# Altium PCB stm32dev.PcbDoc
Units mm, origin at the board's own origin, x right, y up, seen from the top; angles counter-clockwise.
Board outline 32 x 46 mm, 4 copper layers (Top Layer, Mid Layer 1, Mid Layer 2, Bottom Layer), stack 1.57 mm thick; 36 components, 31 nets, 146 pads, 24 vias.
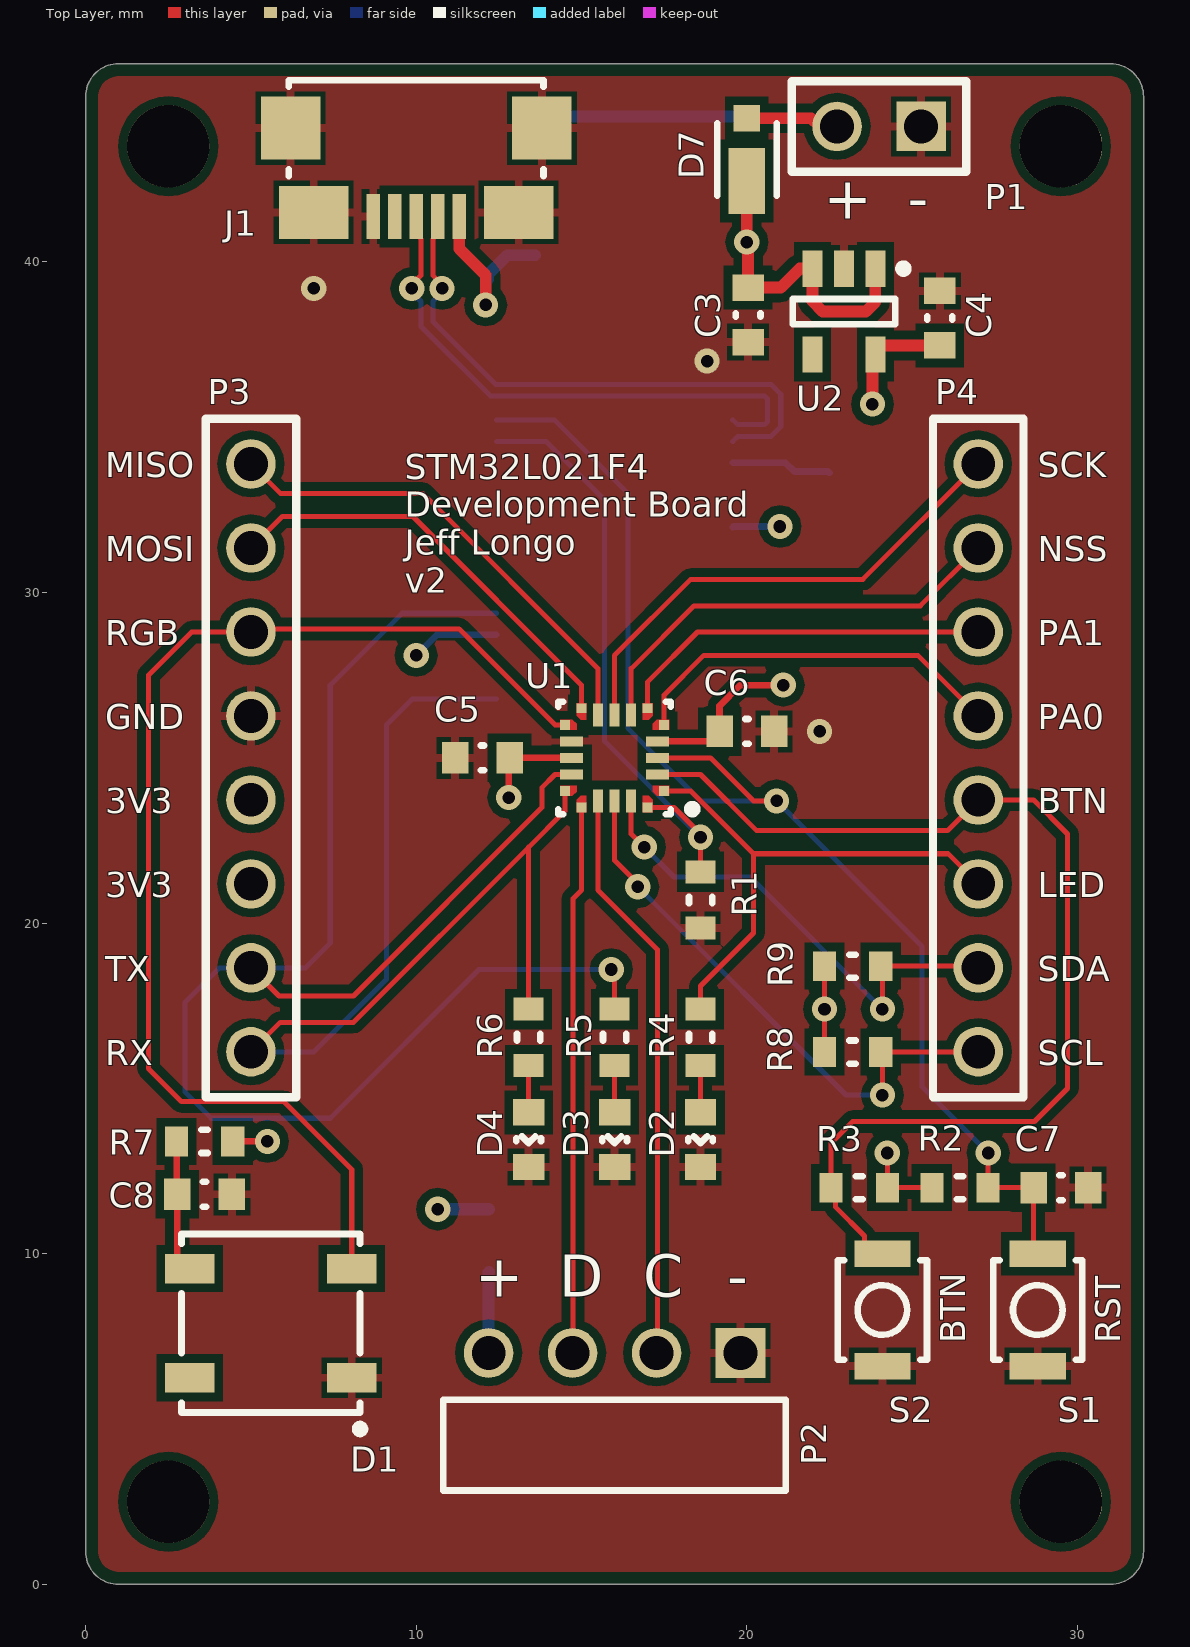
[diagram p0: Top Layer view]
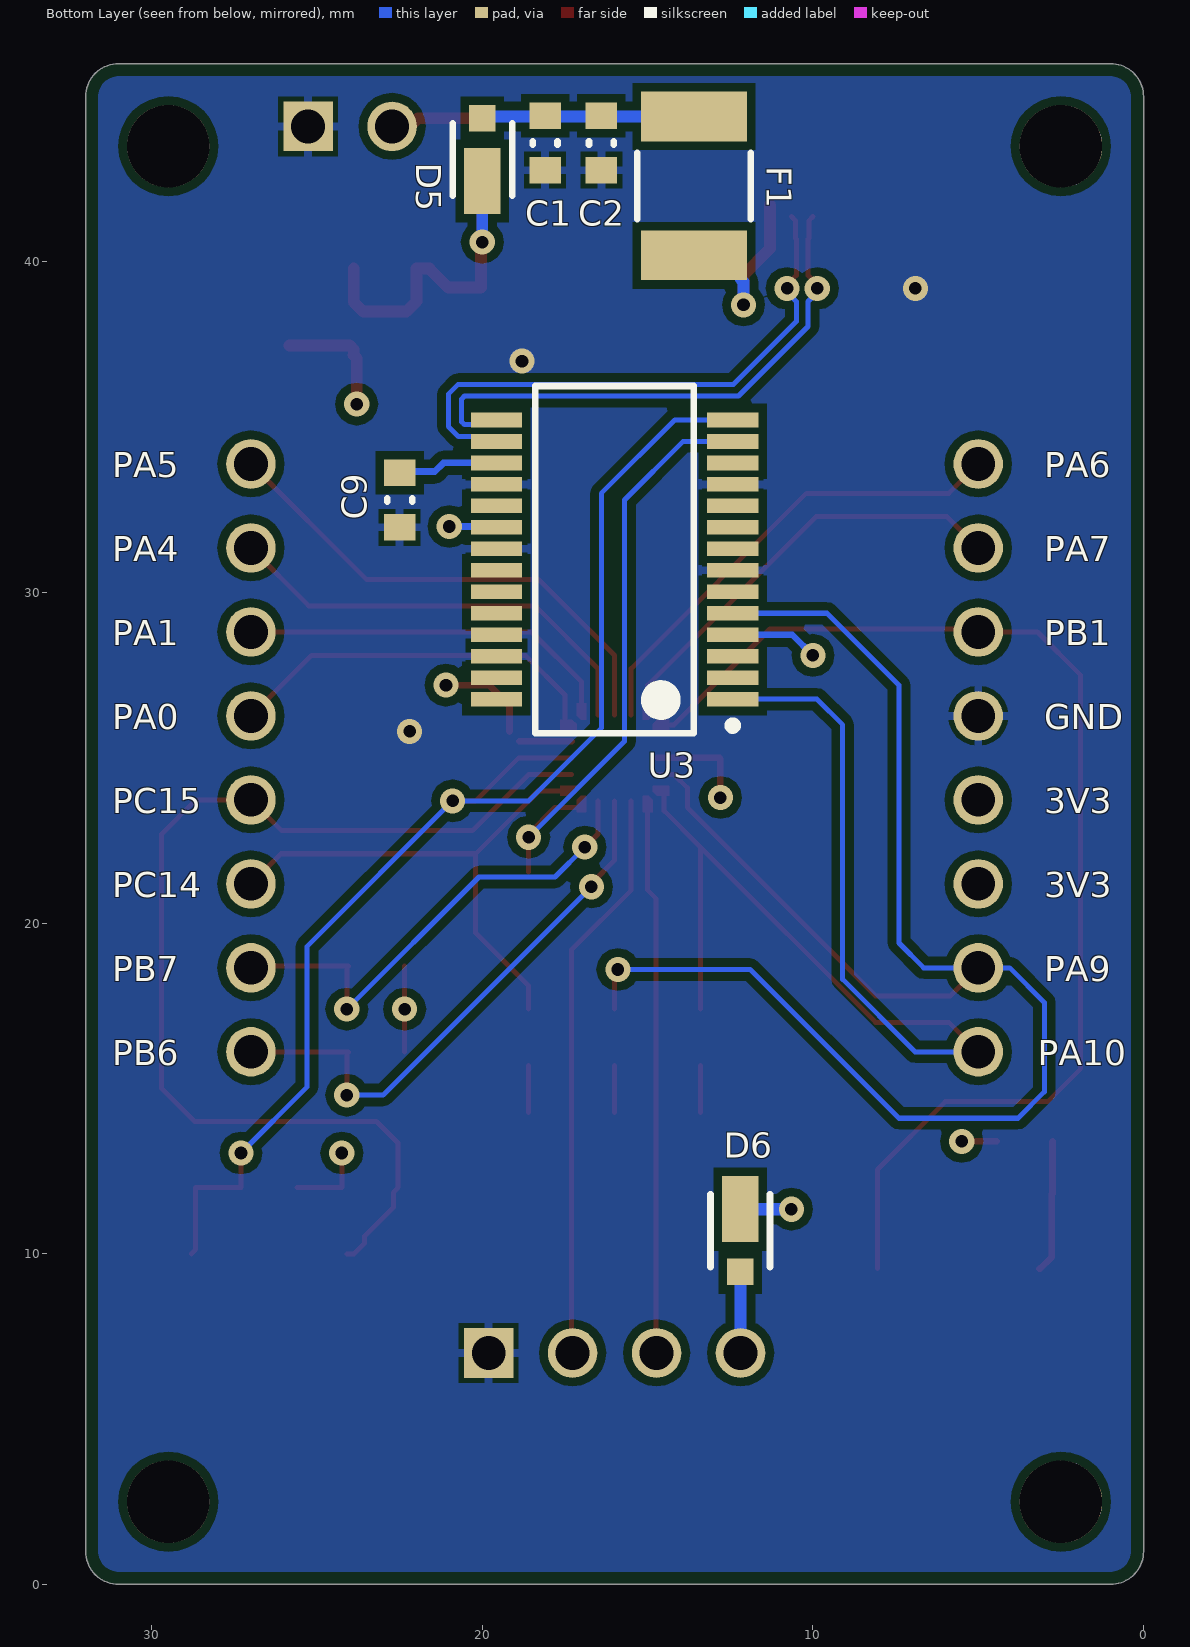
[diagram p1: Bottom Layer view, seen from below]
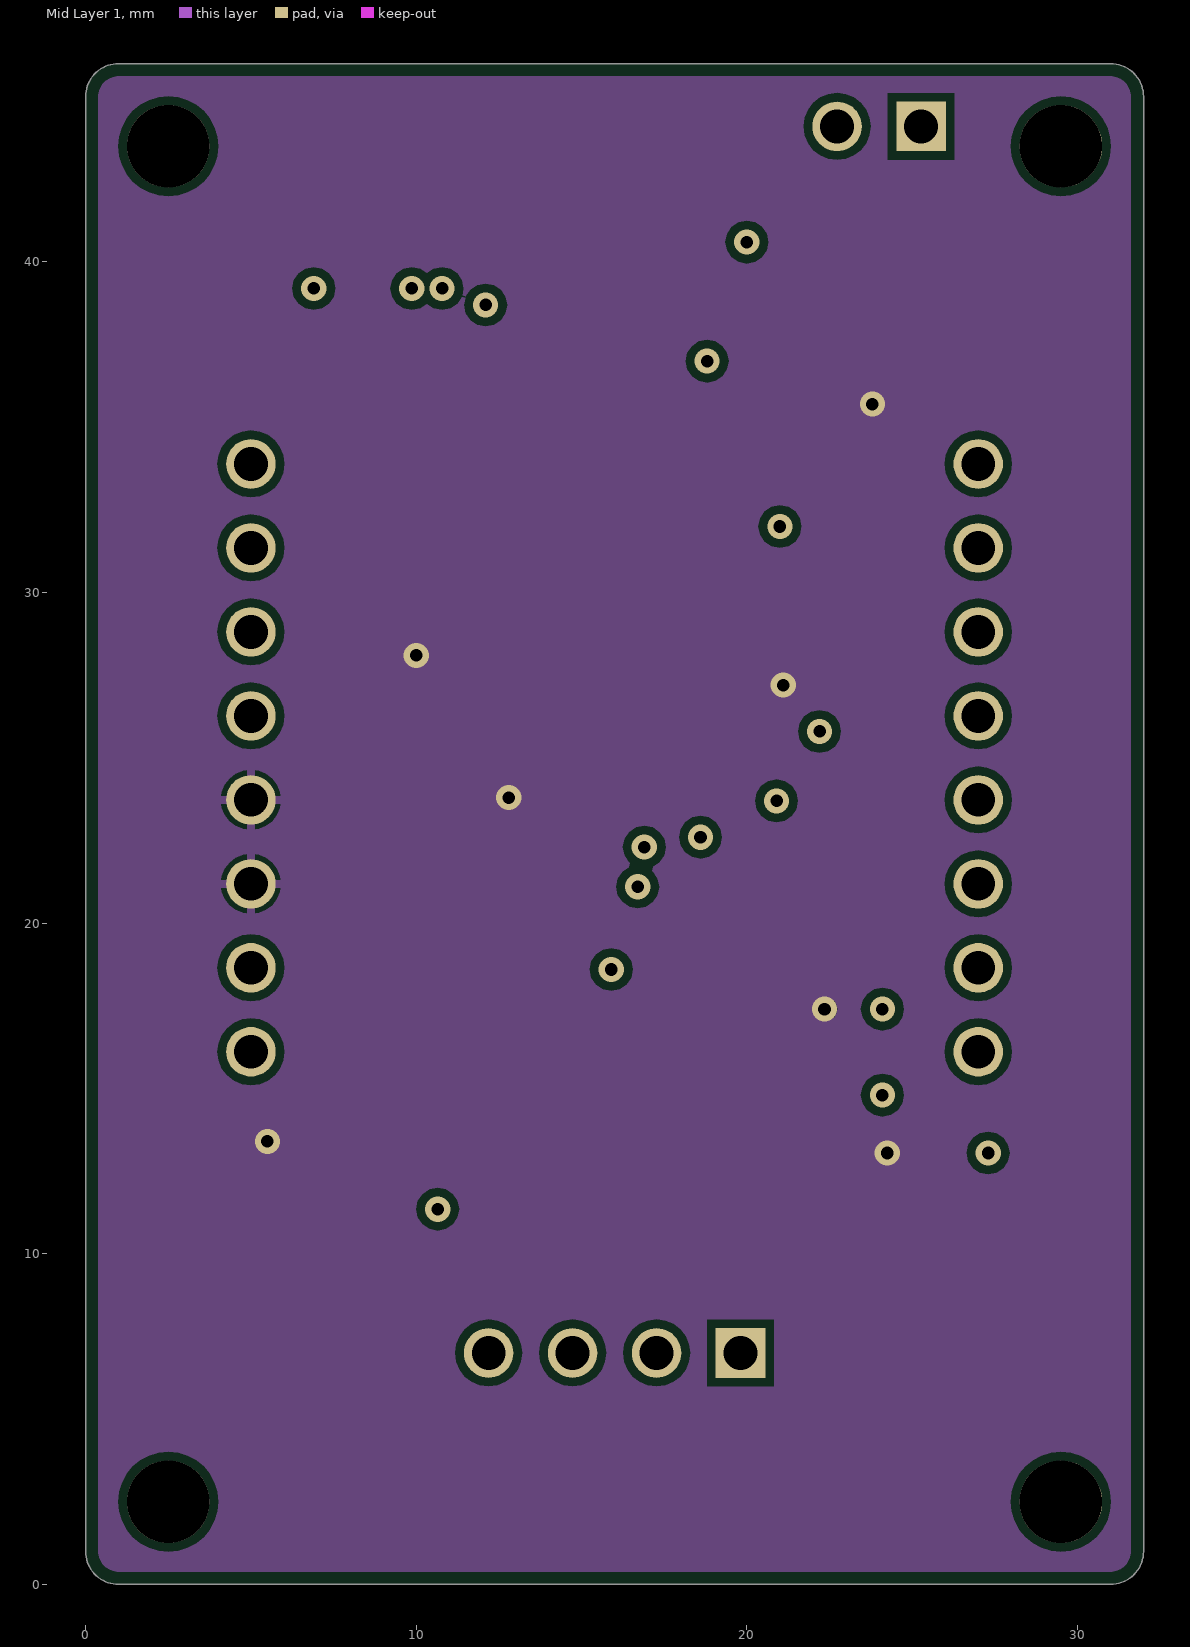
[diagram p2: Mid Layer 1]
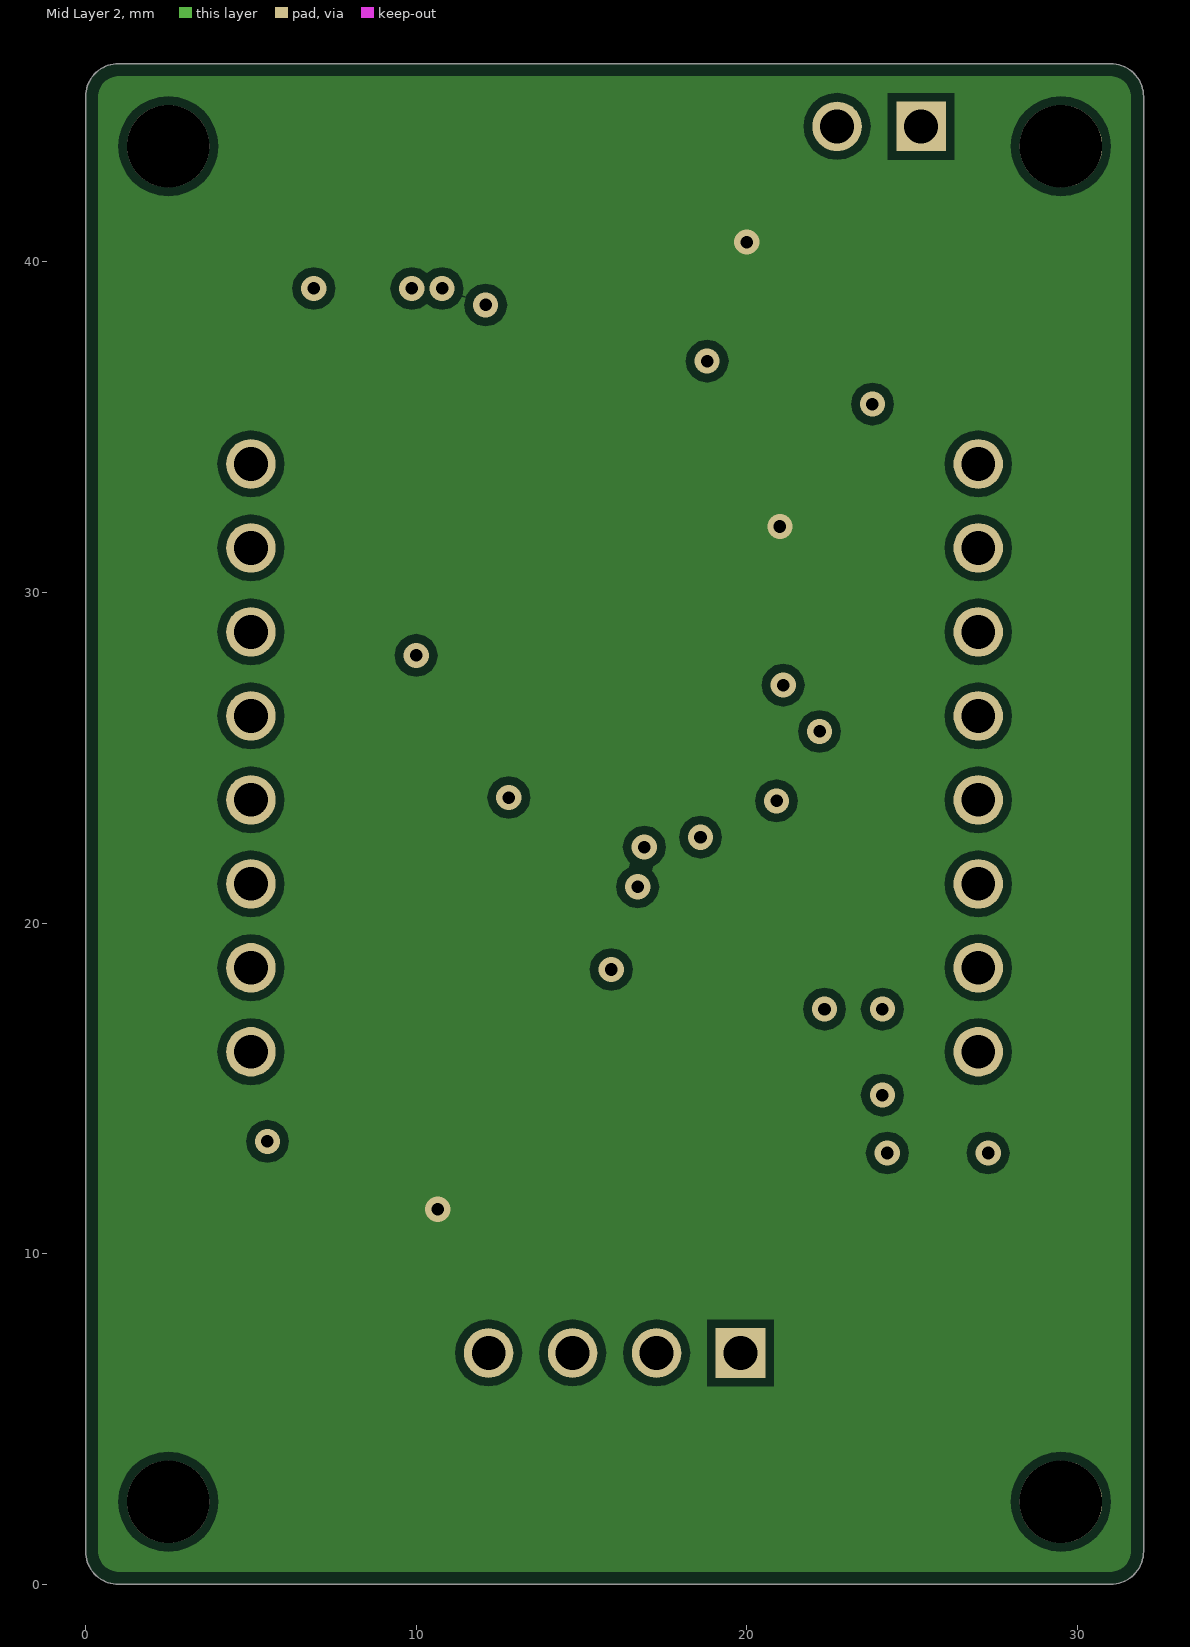
[diagram p3: Mid Layer 2]
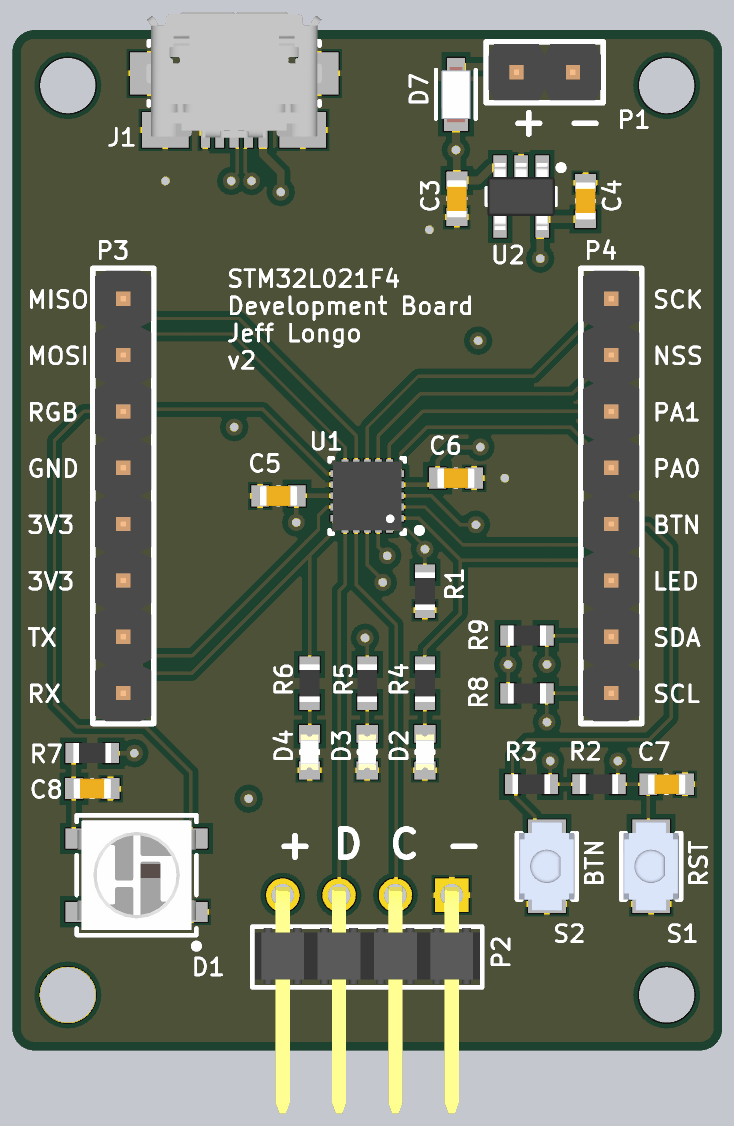
[diagram p4: 3D render of the assembled board from above, using the file's embedded part models]
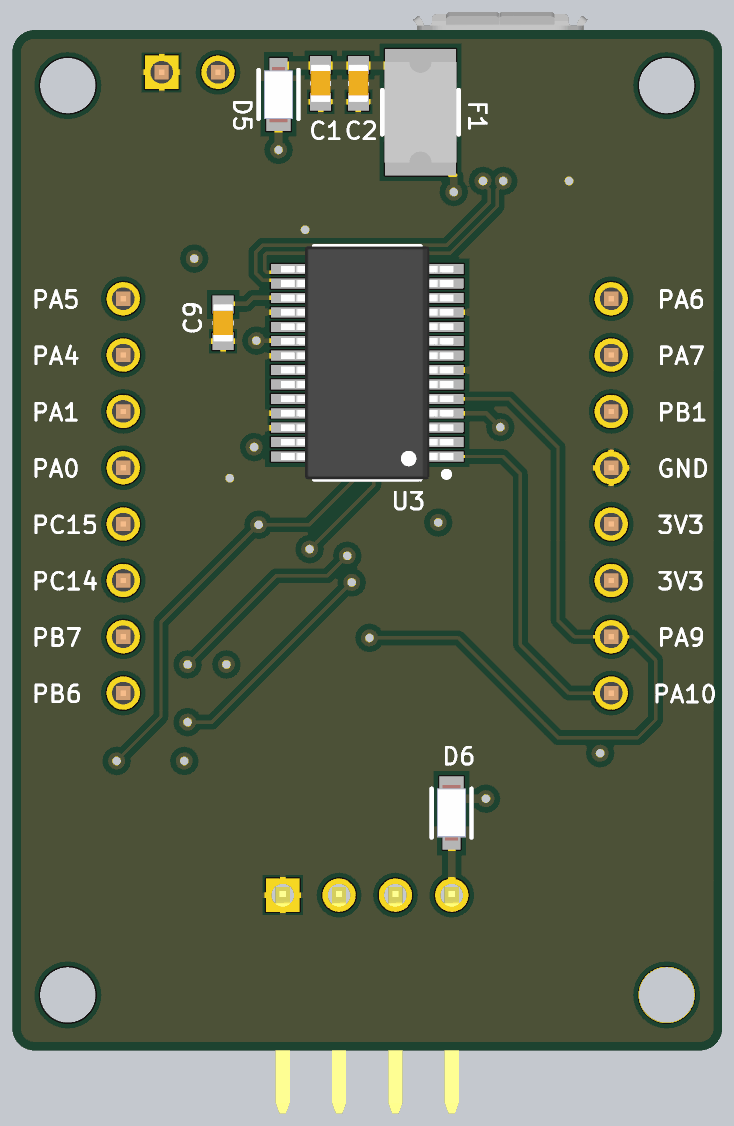
[diagram p5: 3D render of the assembled board from below, using the file's embedded part models]

## Layer stack, top to bottom
Top Solder: solder mask 0.0127, Solder Resist, Dk 3.8
Top Layer: signal copper 0.035
Dielectric 1: prepreg 0.2, 7628, Dk 4.6
Mid Layer 1: signal copper 0.0175
Core: core 1.065, FR-4, Dk 4.5
Mid Layer 2: signal copper 0.0175
Dielectric 2: prepreg 0.2, 7628, Dk 4.6
Bottom Layer: signal copper 0.035
Bottom Solder: solder mask 0.0127, Solder Resist, Dk 3.8

## Board outline
1,0 cw(c1,1) 0,1 0,45 cw(c1,45) 1,46 31,46 cw(c31,45) 32,45 32,1 cw(c31,1) 31,0
cut-out: 2,63

## Design rules (kind name [scope] priority, off if disabled: settings)
BoardOutlineClearance [All] p1: gap=0.381 ignorepadtopadclearanceinfootprint=FALSE
Clearance "Clearance Polygons" [InPolygon] p1: gap=0.254 ignorepadtopadclearanceinfootprint=FALSE except(0: Arc-Hole Track-Hole SMDPad-Hole THPad-Hole Via-Hole Fill-Hole Poly-Hole Region-Hole Text-Hole)
Clearance [All] p2: gap=0.127 ignorepadtopadclearanceinfootprint=FALSE except(0: Arc-Hole Track-Hole SMDPad-Hole THPad-Hole Via-Hole Fill-Hole Poly-Hole Region-Hole Text-Hole)
ComponentClearance "HM-TRP & UFL" [InComponent('X1') vs InComponent('U1')] p1: gap=0 collisioncheckmode=3 verticalgap=0 showdistances=FALSE
ComponentClearance [All] p2: gap=0.025 collisioncheckmode=3 verticalgap=0.025 showdistances=FALSE
DiffPairsRouting [All] p1: maxlimit=10 minlimit=0.127 mostfreqgap=0.203 toplayer_minwidth=0.127 toplayer_maxwidth=0.381 toplayer_prefwidth=0.203 midlayer1_minwidth=0.127 midlayer1_maxwidth=0.381 midlayer1_prefwidth=0.203 midlayer2_minwidth=0.127 midlayer2_maxwidth=0.381 midlayer2_prefwidth=0.203 bottomlayer_minwidth=0.127 bottomlayer_maxwidth=0.381 bottomlayer_prefwidth=0.203 maxuncoupledlength=12.7
HoleSize [All] p1: absolutevalues=TRUE maxlimit=6.731 minlimit=0.254 maxpercent=80.000 minpercent=20.000
HoleToHoleClearance [All] p1: gap=0.254 allowstackedmicrovias=FALSE
MinimumAnnularRing [All] p1: minimumring=0.102
MinimumSolderMaskSliver [All] p1: minsoldermaskwidth=0
PlaneClearance [All] p1: clearance=0.254
PlaneConnect [All] p1: planeconnectstyle=Relief reliefexpansion=0.102 reliefentries=4 reliefconductorwidth=0.152 reliefairgap=0.152
PolygonConnect "Via connect style" [isVia] p1: connectstyle=Direct reliefconductorwidth=0.254 reliefentries=4 polygonreliefangle="90 Angle" airgapwidth=0.254
PolygonConnect [All] p2: connectstyle=Relief reliefconductorwidth=0.254 reliefentries=4 polygonreliefangle="90 Angle" airgapwidth=0.152
RoutingCorners [All] p1: cornerstyle=45-Degree minsetback=1.25 maxsetback=1.25
RoutingVias [All] p1: holewidth=0.305 width=0.559 viastyle="Through Hole" minholewidth=0.254 minwidth=0.457 maxholewidth=2.54 maxwidth=2.896
SilkToSilkClearance [All] p1: silktosilkclearance=0
SilkToSolderMaskClearance [IsPad] p1: minsilkscreentomaskgap=0.127 clearancetoexposedcopper=TRUE
SolderMaskExpansion [All] p1: expansion=0.064 istentingtop=FALSE
Width GND [InNet('GND')] p1: maxlimit=0.762 minlimit=0.254 preferedwidth=0.508
Width Power [InNetClass('Power')] p2: maxlimit=1.016 minlimit=0.508 preferedwidth=0.762
Width 3V3 [InNetClass('3V3')] p3: maxlimit=0.762 minlimit=0.254 preferedwidth=0.508
Width [All] p4: maxlimit=10.16 minlimit=0.152 preferedwidth=0.203
20 further rules are at their usual default settings.

## Classes and differential pairs
differential pair D: +D_P -D_N

## Components (designator, comment, footprint, x,y, rotation, side; value= is the part's Value field where it differs from the comment)
C1 "Capacitor" CAPC1608X09N 18.1,43.6 r90 bottom value=4.7uF
C2 "Capacitor" CAPC1608X09N 16.4,43.6 r90 bottom value=0.1uF
C3 "Capacitor" CAPC1608X09N 20.037,38.4 r90 top value=1uF
C4 "Capacitor" CAPC1608X09N 25.837,38.3 r270 top value=1uF
C5 "Capacitor" CAPC1608X09N 12,25 r0 top value=0.1uF
C6 "Capacitor" CAPC1608X09N 20,25.8 r180 top value=0.1uF
C7 "Capacitor" CAPC1608X09N 29.5,12 r180 top value=0.1uF
C8 "Capacitor" CAPC1608X09N 3.6,11.8 r180 top value=0.1uF
C9 "Capacitor" CAPC1608X09N 22.5,32.8 r90 bottom value=0.1uF
D1 "WS2812B" 5050 5.6,7.9 r0 top
D2 "LED" DIOC1608X09N 18.6,13.45 r270 top
D3 "LED" DIOC1608X09N 16,13.45 r270 top
D4 "LED" DIOC1608X09N 13.4,13.45 r270 top
D5 "MSS1P3L-M3/89A" DO-219AD 20,43.1 r90 bottom
D6 "MSS1P3L-M3/89A" DO-219AD 12.2,10.7 r270 bottom
D7 "MSS1P3L-M3/89A" DO-219AD 20,43.1 r90 top
F1 "MF-MSMF050-2" "1812 (4532 Metric)" 13.6,42.3 r90 bottom
J1 "10118192-0001LF" 10118192-0001LF 10,44.05 r180 top
P1 "61300211121" "2X1 MALE HEADER" 24,44.1 r0 top
P2 "68016-404HLF" 68016-404HLF 16,7 r180 top
P3 "61300811121" "8X1 MALE HEADER" 5,25 r270 top
P4 "61300811121" "8X1 MALE HEADER" 27,25 r270 top
R1 "Resistor" RESC1608X06N 18.6,20.7 r90 top value=10K
R2 "Resistor" RESC1608X06N 26.45,12 r180 top value=10K
R3 "Resistor" RESC1608X06N 23.4,12 r0 top value=10K
R4 "Resistor" RESC1608X06N 18.6,16.55 r90 top value=100
R5 "Resistor" RESC1608X06N 16,16.55 r90 top value=100
R6 "Resistor" RESC1608X06N 13.4,16.55 r90 top value=100
R7 "Resistor" RESC1608X06N 3.6,13.4 r0 top value=0
R8 "Resistor" RESC1608X06N 23.2,16.1 r180 top value=10K
R9 "Resistor" RESC1608X06N 23.2,18.7 r180 top value=10K
S1 "B3U-1000P" B3U-1000P 28.8,8.3 r270 top
S2 "B3U-1000P" B3U-1000P 24.1,8.3 r270 top
U1 "STM32L021F4U6TR" QFN50P300X300X60-20N 16,25 r180 top
U2 "TLV75533PDBVR" SOT95P280X145-5N 22.937,38.5 r270 top
U3 "FT232RL" SOP65P780X200-28N 16,31 r0 bottom

## Footprints (in the part's own frame and the unit in brackets; to place one, negate y for a bottom-side part, rotate by r counter-clockwise, add the part's x,y. Pads: shape width x height; smd on the part's side, far side on the other; paste and mask are expansions set on the pad)
"2X1 MALE HEADER" [mm] "CONN HEADER VERT 2POS 2.54MM"
  round 1.5 hole 1.02: 1(-1.27,0)
  rect 1.5x1.5 hole 1.02: 2(1.27,0)
  silkscreen extent -2.64,-1.37 2.64,1.37, body extent -2.54,-1.27 2.54,1.27, height 7.27
"8X1 MALE HEADER" [mm] "CONN HEADER VERT 8POS 2.54MM"
  round 1.5 hole 1.02: 1(-8.89,0) 2(-6.35,0) 3(-3.81,0) 4(-1.27,0) 5(1.27,0) 6(3.81,0) 7(6.35,0) 8(8.89,0)
  silkscreen extent -10.26,-1.37 10.26,1.37, body extent -10.16,-1.27 10.16,1.27, height 7.27
"1812 (4532 Metric)" [mm]
  rect 1.5x3.2 smd: 1(-2.1,0) 2(2.1,0)
  silkscreen extent -1,-1.72 1,1.72, body extent -2.27,-1.62 2.27,1.62, height 0.7
5050 [mm] "5050, 4-Leads, Body 5.00x5.00mm, Pitch 4.9mm, IPC Medium Density"
  rect 1.5x0.9 smd: 1(-2.45,1.65) 2(-2.45,-1.65) 3(2.45,-1.65) 4(2.45,1.65)
  silkscreen extent -2.7,-3.32 2.83,2.7, body extent -2.67,-2.47 2.68,2.48, height 1.7
68016-404HLF [mm] "CONN HEADER 4POS .100 R/A TIN"
  rect 1.5x1.5 hole 1.02: 1(-3.81,0)
  round 1.5 hole 1.02: 2(-1.27,0) 3(1.27,0) 4(3.81,0)
  silkscreen extent -5.18,1.42 5.18,4.16, body extent -5.08,-0.37 5.08,9.86, height 2.48
10118192-0001LF [mm] "Conn Micro USB 2.0 Type B RCP 5 POS 0.65mm Solder RA SMD 5 Terminal 1 Port T/R"
  rect 0.4x1.35 smd: 1(-1.3,2.675) 2(-0.65,2.675) 3(0,2.675) 4(0.65,2.675) 5(1.3,2.675)
  rect 1.8x1.9 smd: 6(-3.8,0) 6(3.8,0)
  rect 2.1x1.6 smd: 6(-3.1,2.55) 6(3.1,2.55)
  silkscreen extent -3.85,-1.45 3.85,1.45, body extent -3.96,-2.76 5.21,4.57, height 2.75
B3U-1000P [mm] "SWITCH TACTILE SPST-NO 0.05A 12V"
  rect 0.8x1.7 smd: 1(-1.7,0) 2(1.7,0)
  silkscreen extent -1.5,-1.35 1.5,1.35, body extent -2,-1.26 2,1.24, height 1.6
CAPC1608X09N [mm] "Chip Capacitor, 2-Leads, Body 1.60x0.80mm, IPC Medium Density"
  rect 0.8x0.95 smd: 1(-0.825,0) 2(0.825,0)
  silkscreen extent -0.05,-0.38 0.05,0.38, body extent -0.85,-0.45 0.85,0.45, height 0.9
DIOC1608X09N [mm] "Chip Diode, 2-Leads, Body 1.60x0.80mm, IPC Medium Density"
  rect 0.8x0.95 smd: 1(-0.825,0) 2(0.825,0)
  silkscreen extent -0.1,-0.38 0.1,0.38, body extent -0.8,-0.4 0.8,0.4, height 0.8
DO-219AD [mm] "DIODE SCHOTTKY 30V 1A MICROSMP"
  rect 0.8x0.8 smd: 1(1.25,0)
  rect 2x1.1 smd: 2(-0.65,0)
  silkscreen extent -1.1,-0.9 1.1,0.9, body extent -1.26,-0.65 1.24,0.65, height 0.59
QFN50P300X300X60-20N [mm] "QFN, 20-Leads, Body 3.00x3.00mm, Pitch 0.50mm, IPC Medium Density"
  rect 0.3x0.3 smd: 1(-1.5,1) 5(-1.5,-1) 6(-1,-1.5) 10(1,-1.5) 11(1.5,-1) 15(1.5,1) 16(1,1.5) 20(-1,1.5)
  rect 0.7x0.3 smd: 2(-1.3,0.5) 3(-1.3,0) 4(-1.3,-0.5) 12(1.3,-0.5) 13(1.3,0) 14(1.3,0.5)
  rect 0.3x0.7 smd: 7(-0.5,-1.3) 8(0,-1.3) 9(0.5,-1.3) 17(0.5,1.3) 18(0,1.3) 19(-0.5,1.3)
  Top Layer region: 1.65,-0.85 1.15,-0.85 1.15,-1.026 1.274,-1.15 1.65,-1.15
  Top Layer region: -1.65,0.85 -1.15,0.85 -1.15,1.026 -1.274,1.15 -1.65,1.15
  Top Layer region: -0.85,1.65 -0.85,1.15 -1.026,1.15 -1.15,1.274 -1.15,1.65
  Top Layer region: 0.85,1.65 0.85,1.15 1.026,1.15 1.15,1.274 1.15,1.65
  Top Layer region: 1.65,0.85 1.15,0.85 1.15,1.026 1.274,1.15 1.65,1.15
  Top Layer region: 0.85,-1.65 0.85,-1.15 1.026,-1.15 1.15,-1.274 1.15,-1.65
  Top Layer region: -0.85,-1.65 -0.85,-1.15 -1.026,-1.15 -1.15,-1.274 -1.15,-1.65
  Top Layer region: -1.65,-0.85 -1.15,-0.85 -1.15,-1.026 -1.274,-1.15 -1.65,-1.15
  Top Layer region: 0.3,-0.4
  Top Layer region: 0,0
  Top Layer region: 2.9,-0.4
  Top Layer region: -4.064,-0.5
  Top Layer region: -3.937,0.5
  Top Layer region: 3.65,0.45
  silkscreen extent -2.48,-1.7 1.7,1.7, body extent -1.55,-1.55 1.55,1.55, height 0.6
RESC1608X06N [mm] "Chip Resistor, 2-Leads, Body 1.60x0.80mm, IPC Medium Density"
  rect 0.7x0.9 smd: 1(-0.85,0) 2(0.85,0)
  silkscreen extent -0.1,-0.35 0.1,0.35, body extent -0.85,-0.45 0.85,0.45, height 0.55
SOP65P780X200-28N [mm] "SOP, 28-Leads, Body 10.28x5.30mm, Pitch 0.65mm, IPC Medium Density"
  rect 1.55x0.45 smd: 1(-3.575,4.225) 2(-3.575,3.575) 3(-3.575,2.925) 4(-3.575,2.275) 5(-3.575,1.625) 6(-3.575,0.975) 7(-3.575,0.325) 8(-3.575,-0.325) 9(-3.575,-0.975) 10(-3.575,-1.625) 11(-3.575,-2.275) 12(-3.575,-2.925) 13(-3.575,-3.575) 14(-3.575,-4.225) 15(3.575,-4.225) 16(3.575,-3.575) 17(3.575,-2.925) 18(3.575,-2.275) 19(3.575,-1.625) 20(3.575,-0.975) 21(3.575,-0.325) 22(3.575,0.325) 23(3.575,0.975) 24(3.575,1.625) 25(3.575,2.275) 26(3.575,2.925) 27(3.575,3.575) 28(3.575,4.225)
  silkscreen extent -3.7,-5.25 2.4,5.25, body extent -3.89,-5.25 3.89,5.25, height 2
SOT95P280X145-5N [mm] "SOT23, 5-Leads, Body 2.90x2.80mm, Pitch 0.95mm, IPC Medium Density"
  rect 1.1x0.6 smd: 1(-1.3,0.95) 2(-1.3,0) 3(-1.3,-0.95) 4(1.3,-0.95) 5(1.3,0.95)
  silkscreen extent -1.42,-1.55 0.38,1.93, body extent -1.5,-1.52 1.5,1.53, height 1.45

## Part data
C1 C2 C3 C4 C5 C6 C7 C8 C9: "General purpose capacitor", Package=0603
D1: "NeoPixel 5050 RGB LED with Integrated Driver Chip", Color=Blue, Manufacturer="Adafruit Industries", Manufacturer Part Number=1655, ComponentLink1Description=http://www.mouser.com/ds/2/737/SK6812_LED_datasheet_-953546.pdf?src-supplier=Mouser, ComponentLink1URL=http://www.mouser.com/ds/2/737/SK6812_LED_datasheet_-953546.pdf?src-supplier=Mouser, ComponentLink2Description=https://cdn-shop.adafruit.com/product-files/1138/SK6812+LED+datasheet+.pdf?src-supplier=Digi-Key, ComponentLink2URL=https://cdn-shop.adafruit.com/product-files/1138/SK6812+LED+datasheet+.pdf?src-supplier=Digi-Key, ComponentLink3Description=http://datasheet.octopart.com/ADA1655-Adafruit-Industries-datasheet-32028139.pdf, ComponentLink3URL=http://datasheet.octopart.com/ADA1655-Adafruit-Industries-datasheet-32028139.pdf, Length=5mm, Mount="Surface Mount", Number of LEDs=10, Pricing 1="1 = 4.50000 (USD)", Stock 1=4542, Supplier 1=Digi-Key, Width=5mm
D2 D3 D4: "General purpose LED"
D5 D6 D7: "DIODE SCHOTTKY 30V 1A MICROSMP", Average Rectified Current=1A, Forward Voltage=500mV, Manufacturer="Vishay Semiconductors", Max Forward Surge Current (Ifsm)=25A, Max Operating Temperature=150°C, Max Repetitive Reverse Voltage (Vrrm)=30V, Max Reverse Leakage Current=250uA, Min Operating Temperature=-55°C, Package Quantity=1, ComponentLink1Description=https://datasheet.ciiva.com/23642/mss1p3l-23642464.pdf?src-supplier=Newark, ComponentLink1URL=https://datasheet.ciiva.com/23642/mss1p3l-23642464.pdf?src-supplier=Newark, ComponentLink2Description=https://datasheet.ciiva.com/917/mss1p3l-917251.pdf?src-supplier=Digi-Key, ComponentLink2URL=https://datasheet.ciiva.com/917/mss1p3l-917251.pdf?src-supplier=Digi-Key, ComponentLink3Description=https://datasheet.ciiva.com/917/mss1p3l-917252.pdf?src-supplier=Digi-Key, ComponentLink3URL=https://datasheet.ciiva.com/917/mss1p3l-917252.pdf?src-supplier=Digi-Key, ComponentLink4Description=https://datasheet.ciiva.com/917/mss1p3l-917253.pdf?src-supplier=Digi-Key, ComponentLink4URL=https://datasheet.ciiva.com/917/mss1p3l-917253.pdf?src-supplier=Digi-Key, ComponentLink5Description=https://datasheet.ciiva.com/25934/mss1p3l-25934805.pdf?src-supplier=Avnet+Europe, ComponentLink5URL=https://datasheet.ciiva.com/25934/mss1p3l-25934805.pdf?src-supplier=Avnet+Europe, ComponentLink6Description=https://datasheet.ciiva.com/16464/mss1p3l-16464118.pdf?src-supplier=Future+Electronics, ComponentLink6URL=https://datasheet.ciiva.com/16464/mss1p3l-16464118.pdf?src-supplier=Future+Electronics, ComponentLink7Description=https://datasheet.ciiva.com/8290/mss1p3l-8290391.pdf?src-supplier=Avnet, ComponentLink7URL=https://datasheet.ciiva.com/8290/mss1p3l-8290391.pdf?src-supplier=Avnet, ComponentLink8Description=https://datasheet.ciiva.com/7962/mss1p3l-7962344.pdf?src-supplier=Element14, ComponentLink8URL=https://datasheet.ciiva.com/7962/mss1p3l-7962344.pdf?src-supplier=Element14, Element Configuration=Single, Forward Current=1A, Height=0.018inch, Lead Free="Lead Free", Length=0.09inch, Manufacturer Part Number=MSS1P3L-M3/89A, Max Reverse Voltage (DC)=30V, Max Surge Current=25A, Mount="Surface Mount", Number of Pins=2, Packaging="Tape and Reel", Peak Non-Repetitive Surge Current=25A, Peak Reverse Current=250uA, Pricing 1="1=0.41000, 10=0.30700, 100=0.14600, 500=0.11910, 1000=0.08837 (USD)", Radiation Hardening=No, REACH SVHC=Unknown, RoHS=Yes, Stock 1=323215, Supplier 1=Digi-Key, Width=0.055inch
F1: "PTC Resettable Fuse 100A 15V T/R", Case/Package=1812, Case Code (Metric)=4532, Current Rating=100A, Hold Current=500mA, Manufacturer=Bourns, Max Operating Temperature=85°C, Min Operating Temperature=-40°C, Operating Supply Voltage=15V, Package Quantity=2000, Power Dissipation=800mW, Resistance=150mR, Trip Current=1A, Approvals=UL,CSA,TUV, Case Code (Imperial)=1812, ComponentLink1Description=https://datasheet.ciiva.com/34302/1164200-34302041.pdf?src-supplier=Jameco, ComponentLink1URL=https://datasheet.ciiva.com/34302/1164200-34302041.pdf?src-supplier=Jameco, ComponentLink2Description=https://datasheet.ciiva.com/326/mfmsmf-326354.pdf?src-supplier=Digi-Key, ComponentLink2URL=https://datasheet.ciiva.com/326/mfmsmf-326354.pdf?src-supplier=Digi-Key, ComponentLink3Description=https://datasheet.ciiva.com/1228/1786007-1228155.pdf?src-supplier=Newark, ComponentLink3URL=https://datasheet.ciiva.com/1228/1786007-1228155.pdf?src-supplier=Newark, ComponentLink4Description=https://datasheet.ciiva.com/16205/mfmsmf-16205994.pdf?src-supplier=Onlinecomponents.com, ComponentLink4URL=https://datasheet.ciiva.com/16205/mfmsmf-16205994.pdf?src-supplier=Onlinecomponents.com, ComponentLink5Description=https://datasheet.ciiva.com/14537/70153434-14537737.pdf?src-supplier=Allied+Electronics, ComponentLink5URL=https://datasheet.ciiva.com/14537/70153434-14537737.pdf?src-supplier=Allied+Electronics, ComponentLink6Description=https://datasheet.ciiva.com/46395/1695373-46395287.pdf?src-supplier=Element14, ComponentLink6URL=https://datasheet.ciiva.com/46395/1695373-46395287.pdf?src-supplier=Element14, ComponentLink7Description=https://datasheet.ciiva.com/22749/1695373-22749079.pdf?src-supplier=Element14, ComponentLink7URL=https://datasheet.ciiva.com/22749/1695373-22749079.pdf?src-supplier=Element14, ComponentLink8Description=https://datasheet.ciiva.com/32426/mf-msmf-series-eng-tds-32426126.pdf?src-supplier=Distrelec, ComponentLink8URL=https://datasheet.ciiva.com/32426/mf-msmf-series-eng-tds-32426126.pdf?src-supplier=Distrelec, ComponentLink9Description=https://datasheet.ciiva.com/4501/mfmsmf-72300-4501655.pdf?src-supplier=Mouser, ComponentLink9URL=https://datasheet.ciiva.com/4501/mfmsmf-72300-4501655.pdf?src-supplier=Mouser, ComponentLink10Description=https://datasheet.ciiva.com/3019/mfmsmf-3019622.pdf?src-supplier=Avnet, ComponentLink10URL=https://datasheet.ciiva.com/3019/mfmsmf-3019622.pdf?src-supplier=Avnet, ComponentLink11Description=https://datasheet.ciiva.com/3019/mfmsmf-3019621.pdf?src-supplier=Avnet, ComponentLink11URL=https://datasheet.ciiva.com/3019/mfmsmf-3019621.pdf?src-supplier=Avnet, ComponentLink12Description=https://datasheet.ciiva.com/326/mfmsmf-326356.pdf?src-supplier=Digi-Key, ComponentLink12URL=https://datasheet.ciiva.com/326/mfmsmf-326356.pdf?src-supplier=Digi-Key, ComponentLink13Description=https://datasheet.ciiva.com/1274/1786007-1274499.pdf?src-supplier=Element14, ComponentLink13URL=https://datasheet.ciiva.com/1274/1786007-1274499.pdf?src-supplier=Element14, ComponentLink14Description=https://datasheet.ciiva.com/326/mfmsmf-326355.pdf?src-supplier=Digi-Key, ComponentLink14URL=https://datasheet.ciiva.com/326/mfmsmf-326355.pdf?src-supplier=Digi-Key, ComponentLink15Description=https://datasheet.ciiva.com/1274/1786007-1274498.pdf?src-supplier=Element14, ComponentLink15URL=https://datasheet.ciiva.com/1274/1786007-1274498.pdf?src-supplier=Element14, ComponentLink16Description=https://datasheet.ciiva.com/15226/getdatasheetpartid-117168-15226886.pdf?src-supplier=Verical, ComponentLink16URL=https://datasheet.ciiva.com/15226/getdatasheetpartid-117168-15226886.pdf?src-supplier=Verical, ComponentLink17Description=https://datasheet.ciiva.com/25894/mfmsmf-25894175.pdf?src-supplier=Avnet+Europe, ComponentLink17URL=https://datasheet.ciiva.com/25894/mfmsmf-25894175.pdf?src-supplier=Avnet+Europe, Contact Plating=Gold, Height=0.85mm, Lead Free="Lead Free", Length=4.73mm, Manufacturer Part Number=MF-MSMF050-2, Max Current Rating=100A, Mount="Surface Mount,PCB", Number of Terminals=2, Packaging="Tape and Reel", Pricing 1="1=0.47000, 5=0.45800, 10=0.44400, 50=0.37340, 100=0.31010, 250=0.28188, 500=0.23960, 1000=0.21141 (USD)", Radiation Hardening=No, REACH SVHC="No SVHC", RoHS=Yes, Stock 1=93624, Supplier 1=Digi-Key, Terminal Material=Gold, Termination=SMD/SMT, Time to Trip=0.15s, Voltage Rating=15V, Voltage Rating (DC)=15V, Width=3.41mm
J1: "Conn Micro USB 2.0 Type B RCP 5 POS 0.65mm Solder RA SMD 5 Terminal 1 Port T/R", Color=Black, Current Rating=1.8A, Flammability Rating="UL94 V-0", Insulation Resistance=1GR, Manufacturer="Framatome Connectors", Max Operating Temperature=85°C, Max Voltage Rating (AC)=100V, Min Operating Temperature=-55°C, Package Quantity=1400, ComponentLink1Description=https://datasheet.ciiva.com/26853/getdatasheetpartid-418041-26853891.pdf?src-supplier=Verical, ComponentLink1URL=https://datasheet.ciiva.com/26853/getdatasheetpartid-418041-26853891.pdf?src-supplier=Verical, ComponentLink2Description=https://datasheet.ciiva.com/851/10118192-851112.pdf?src-supplier=Digi-Key, ComponentLink2URL=https://datasheet.ciiva.com/851/10118192-851112.pdf?src-supplier=Digi-Key, ComponentLink3Description=https://datasheet.ciiva.com/4598/10118192ac-197249-4598796.pdf?src-supplier=Mouser, ComponentLink3URL=https://datasheet.ciiva.com/4598/10118192ac-197249-4598796.pdf?src-supplier=Mouser, ComponentLink4Description=http://datasheet.octopart.com/10118192-0001LF-FCI-datasheet-55953129.pdf?src-supplier=TME, ComponentLink4URL=http://datasheet.octopart.com/10118192-0001LF-FCI-datasheet-55953129.pdf?src-supplier=TME, ComponentLink5Description=http://datasheet.octopart.com/10118192-0001LF-FCI-datasheet-13423637.pdf?src-supplier=Allied+Electronics, ComponentLink5URL=http://datasheet.octopart.com/10118192-0001LF-FCI-datasheet-13423637.pdf?src-supplier=Allied+Electronics, ComponentLink6Description=http://datasheet.octopart.com/10118192-0001LF-Amphenol-datasheet-96019471.pdf?src-supplier=Newark, ComponentLink6URL=http://datasheet.octopart.com/10118192-0001LF-Amphenol-datasheet-96019471.pdf?src-supplier=Newark, ComponentLink7Description=http://datasheet.octopart.com/10118192-0001LF-Amphenol-ICC-datasheet-96019471.pdf?src-supplier=Element14, ComponentLink7URL=http://datasheet.octopart.com/10118192-0001LF-Amphenol-ICC-datasheet-96019471.pdf?src-supplier=Element14, ComponentLink8Description=http://datasheet.octopart.com/10118192-0001LF-Amphenol-ICC-datasheet-55953129.pdf?src-supplier=Future+Electronics, ComponentLink8URL=http://datasheet.octopart.com/10118192-0001LF-Amphenol-ICC-datasheet-55953129.pdf?src-supplier=Future+Electronics, ComponentLink9Description=http://datasheet.octopart.com/10118192-0001LF-Amphenol-ICC-datasheet-13423637.pdf?src-supplier=Allied+Electronics, ComponentLink9URL=http://datasheet.octopart.com/10118192-0001LF-Amphenol-ICC-datasheet-13423637.pdf?src-supplier=Allied+Electronics, ComponentLink10Description=http://datasheet.octopart.com/10118192-0001LF-ICC-datasheet-96019471.pdf?src-supplier=Farnell, ComponentLink10URL=http://datasheet.octopart.com/10118192-0001LF-ICC-datasheet-96019471.pdf?src-supplier=Farnell, ComponentLink11Description=http://datasheet.octopart.com/10118192-0001LF-ICC-datasheet-55953129.pdf?src-supplier=Farnell, ComponentLink11URL=http://datasheet.octopart.com/10118192-0001LF-ICC-datasheet-55953129.pdf?src-supplier=Farnell, Connector Type=USB, Contact Material="Copper Alloy", Contact Plating=Gold, Depth=5.57mm, Features=Shielded, Gender=Receptacle, Housing Material=Polymer, Lead Free="Lead Free", Length=7.86mm, Manufacturer Part Number=10118192-0001LF, Mount="Surface Mount", Number of Contacts=5, Number of Ports=1, Number of Terminals=5, Orientation="Right Angle", Packaging="Tape and Reel", Pitch=0.65mm, Pricing 1="1 = 0.43000, 10 = 0.40500, 25 = 0.36440, 50 = 0.32400, 100 = 0.31040, 250 = 0.28344, 500 = 0.26994 (USD)", Radiation Hardening=No, REACH SVHC="No SVHC", Stock 1=43734, Supplier 1=Digi-Key, Termination=Solder, USB Standard="USB 2.0", Voltage Rating=100V
P1: "Headers & Wire Housings WR-PHD 2.54mm 2Pin THT Header", Color=Black, Current Rating=3A, Manufacturer="Wurth Electronics", Max Operating Temperature=125°C, Min Operating Temperature=-40°C, Voltage Rating=250V, ComponentLink1Description=https://datasheet.ciiva.com/13619/6130xx11121-48870-13619345.pdf?src-supplier=Mouser, ComponentLink1URL=https://datasheet.ciiva.com/13619/6130xx11121-48870-13619345.pdf?src-supplier=Mouser, Connector Type="Male Pin", Contact Gender=Male, Contact Material="Copper Alloy,Copper", Contact Mating Length=0.236inch, Contact Plating=Gold, Gender=Male, Housing Material=PBT, Lead Free="Lead Free", Manufacturer Part Number=61300211121, Mount="Through Hole", Number of Contacts=2, Number of Positions=2, Number of Rows=1, Packaging=Bulk, Pitch=0.1inch, Pricing 1="1=0.13000, 10=0.10600, 25=0.08800, 50=0.07400, 100=0.06700, 1000=0.06100 (USD)", REACH SVHC=Unknown, RoHS=Yes, Stock 1=208781, Supplier 1=Digi-Key, Termination="Through Hole"
P2: "CONN HEADER 4POS .100 R/A TIN", Color=Black, Current Rating=3A, Flammability Rating="UL94 V-0", Insulation Resistance=5GR, Manufacturer="Amphenol FCI", Max Operating Temperature=125°C, Max Voltage Rating (AC)=1.5kV, Min Operating Temperature=-65°C, Package Quantity=100, ComponentLink1Description=https://datasheet.ciiva.com/10144/68015-10144694.pdf?src-supplier=Avnet, ComponentLink1URL=https://datasheet.ciiva.com/10144/68015-10144694.pdf?src-supplier=Avnet, ComponentLink2Description=https://datasheet.ciiva.com/721/68015-721854.pdf?src-supplier=Digi-Key, ComponentLink2URL=https://datasheet.ciiva.com/721/68015-721854.pdf?src-supplier=Digi-Key, Connector Type="Male Pin", Contact Gender=Male, Contact Material=Bronze, Contact Mating Length=0.23inch, Contact Plating=Tin, Contact Post Length=3.05mm, Depth=9.9mm, Gender=Male, Housing Color=Black, Housing Material=Thermoplastic, Lead Free="Lead Free", Length=10.16mm, Manufacturer Part Number=68016-404HLF, Mount="Through Hole", Number of Contacts=4, Number of Positions=4, Number of Rows=1, Orientation="Right Angle", Packaging=Bulk, Pitch=2.54mm, Pricing 1="1=0.18000, 10=0.17000, 100=0.11800, 500=0.09988, 1000=0.08172, 5000=0.07264, 10000=0.06583 (USD)", Radiation Hardening=No, RoHS=Yes, Stock 1=4219, Supplier 1=Digi-Key, Termination=Solder, Voltage Rating=1.5kV
P3 P4: "WURTH ELEKTRONIK         61300811121            Board-To-Board Connector, Vertical, WR-PHD Series, Through Hole, Header, 8 Contacts, 2.54 mm", Color=Black, Manufacturer="Wurth Electronics", ComponentLink1Description=http://www.farnell.com/cad/1737268.pdf?src-supplier=Element14, ComponentLink1URL=http://www.farnell.com/cad/1737268.pdf?src-supplier=Element14, ComponentLink2Description=https://katalog.we-online.de/em/datasheet/6130xx11121.pdf?src-supplier=Digi-Key, ComponentLink2URL=https://katalog.we-online.de/em/datasheet/6130xx11121.pdf?src-supplier=Digi-Key, Connector Type="Male Pin", Contact Material=Copper, Contact Mating Length=0.236inch, Contact Plating=Gold, Gender=Male, Manufacturer Part Number=61300811121, Mount="Through Hole", Number of Contacts=8, Number of Positions=8, Number of Rows=1, Packaging=Bulk, Pitch=0.1inch, Pricing 1="1=0.37000, 10=0.31500, 25=0.26320, 50=0.21900, 100=0.19900, 1000=0.18100 (USD)", REACH SVHC=Unknown, RoHS=Yes, Stock 1=5439, Supplier 1=Digi-Key, Termination=Solder
R1 R2 R3 R4 R5 R6 R7 R8 R9: "General purpose resistor", Package=0603
S1 S2: "OMRON ELECTRONIC COMPONENTS         B3U-1000P            SWITCH, SPST-NO, 0.05A, 12V, SMD", Contact Current Rating=50mA, Contact Resistance=100mR, Insulation Resistance=100MR, Manufacturer=Omron, Max Operating Temperature=70°C, Max Voltage Rating (DC)=12V, Min Operating Temperature=-25°C, Operating Force=1.5N, Package Quantity=1, Ratings="Dust Proof,IP40", Actuator Length=0.4mm, Actuator Type=Standard, ComponentLink1Description=https://datasheet.ciiva.com/26917/getdatasheetpartid-552554-26917552.pdf?src-supplier=Verical, ComponentLink1URL=https://datasheet.ciiva.com/26917/getdatasheetpartid-552554-26917552.pdf?src-supplier=Verical, ComponentLink2Description=https://datasheet.ciiva.com/22696/1685550-22696214.pdf?src-supplier=Element14, ComponentLink2URL=https://datasheet.ciiva.com/22696/1685550-22696214.pdf?src-supplier=Element14, ComponentLink3Description=https://datasheet.ciiva.com/1532/1685550-1532680.pdf?src-supplier=Element14, ComponentLink3URL=https://datasheet.ciiva.com/1532/1685550-1532680.pdf?src-supplier=Element14, ComponentLink4Description=https://datasheet.ciiva.com/1634/1685550-1634396.pdf?src-supplier=Farnell, ComponentLink4URL=https://datasheet.ciiva.com/1634/1685550-1634396.pdf?src-supplier=Farnell, ComponentLink5Description=https://datasheet.ciiva.com/14142/b3u-eng-datasheet-14142540.pdf?src-supplier=Distrelec, ComponentLink5URL=https://datasheet.ciiva.com/14142/b3u-eng-datasheet-14142540.pdf?src-supplier=Distrelec, ComponentLink6Description=https://datasheet.ciiva.com/2900/b3u-1110-2900029.pdf?src-supplier=Digi-Key, ComponentLink6URL=https://datasheet.ciiva.com/2900/b3u-1110-2900029.pdf?src-supplier=Digi-Key, ComponentLink7Description=https://datasheet.ciiva.com/16155/en-b3u-16155021.pdf?src-supplier=Onlinecomponents.com, ComponentLink7URL=https://datasheet.ciiva.com/16155/en-b3u-16155021.pdf?src-supplier=Onlinecomponents.com, ComponentLink8Description=https://datasheet.ciiva.com/2900/b3u-1110-2900030.pdf?src-supplier=Digi-Key, ComponentLink8URL=https://datasheet.ciiva.com/2900/b3u-1110-2900030.pdf?src-supplier=Digi-Key, ComponentLink9Description=https://datasheet.ciiva.com/16862/70176037-16862846.pdf?src-supplier=Allied+Electronics, ComponentLink9URL=https://datasheet.ciiva.com/16862/70176037-16862846.pdf?src-supplier=Allied+Electronics, ComponentLink10Description=https://datasheet.ciiva.com/2900/b3u-1110-2900031.pdf?src-supplier=Digi-Key, ComponentLink10URL=https://datasheet.ciiva.com/2900/b3u-1110-2900031.pdf?src-supplier=Digi-Key, Contact Material=Silver, Current Rating=50mA, Depth=2.5mm, Electrical Life=200000Cycles, Height=1.2mm, Illumination Type=Non-Illuminated,Illuminated, Lead Free="Lead Free", Length=4mm, Manufacturer Part Number=B3U-1000P, Max Current Rating=50mA, Mechanical Life=200000Cycles, Mount="Surface Mount", Orientation=Straight, Packaging="Tape and Reel", Pricing 1="1=0.84000, 10=0.80700, 25=0.76080, 50=0.66960, 100=0.60880, 250=0.57836, 500=0.56312, 1000=0.44137 (USD)", REACH SVHC=Unknown, RoHS=Yes, Stock 1=38234, Supplier 1=Digi-Key, Switch Function=Off-Mom, Switch Travel=0.15mm, Termination=SMD/SMT, Throw Configuration=SPST, Voltage Rating (DC)=12V, Weight=0.000776oz, Width=3mm
U1: "MCU 32-Bit STM32L021x4 ARM Cortex M0+ RISC 16KB Flash 2.5V/3.3V 20-Pin UFQFPN T/R", Manufacturer=STMicroelectronics, ComponentLink1Description=http://www.st.com/content/ccc/resource/technical/document/datasheet/86/a6/5f/95/33/50/4e/d6/DM00206858.pdf/files/DM00206858.pdf/jcr:content/translations/en.DM00206858.pdf?src-supplier=Digi-Key, ComponentLink1URL=http://www.st.com/content/ccc/resource/technical/document/datasheet/86/a6/5f/95/33/50/4e/d6/DM00206858.pdf/files/DM00206858.pdf/jcr:content/translations/en.DM00206858.pdf?src-supplier=Digi-Key, ComponentLink2Description=http://datasheet.octopart.com/STM32L021F4U6TR-STMicroelectronics-datasheet-62073766.pdf?src-supplier=STMicroelectronics, ComponentLink2URL=http://datasheet.octopart.com/STM32L021F4U6TR-STMicroelectronics-datasheet-62073766.pdf?src-supplier=STMicroelectronics, ComponentLink3Description=http://datasheet.octopart.com/STM32L021F4U6TR-STMicroelectronics-datasheet-62336774.pdf?src-supplier=STMicroelectronics, ComponentLink3URL=http://datasheet.octopart.com/STM32L021F4U6TR-STMicroelectronics-datasheet-62336774.pdf?src-supplier=STMicroelectronics, Manufacturer Part Number=STM32L021F4U6TR, Pricing 1="1 = 1.94000, 10 = 1.65000, 100 = 1.32000, 500 = 1.16000, 1000 = 0.95600, 3000 = 0.89000 (USD)", Stock 1=77, Supplier 1=Mouser
U2: "IC REG LINEAR 3.3V 500MA SOT23-5", Manufacturer="Texas Instruments", Max Operating Temperature=125°C, Min Operating Temperature=-40°C, ComponentLink1Description=http://www.ti.com/lit/ds/symlink/tlv755p.pdf?src-supplier=Digi-Key, ComponentLink1URL=http://www.ti.com/lit/ds/symlink/tlv755p.pdf?src-supplier=Digi-Key, Manufacturer Part Number=TLV75533PDBVR, Pricing 1="1=0.63000, 10=0.55100, 100=0.39250, 500=0.31730, 1000=0.24215 (USD)", RoHS=No, Stock 1=25120, Supplier 1=Digi-Key
U3: "IC USB FS SERIAL UART 28-SSOP", Case/Package=SSOP, Manufacturer=FTDI, Manufacturer Part Number=FT232RL-REEL, Max Operating Temperature=85°C, Max Supply Voltage=5.25V, Min Operating Temperature=-40°C, Min Supply Voltage=3.3V, Operating Supply Current=15mA, Package Quantity=2000, Voltage=5V, ComponentLink1Description=https://datasheet.ciiva.com/34304/2161019-34304054.pdf?src-supplier=Jameco, ComponentLink1URL=https://datasheet.ciiva.com/34304/2161019-34304054.pdf?src-supplier=Jameco, ComponentLink2Description=https://datasheet.ciiva.com/4787/ds-ft232r-11534-4787658.pdf?src-supplier=Mouser, ComponentLink2URL=https://datasheet.ciiva.com/4787/ds-ft232r-11534-4787658.pdf?src-supplier=Mouser, ComponentLink3Description=https://datasheet.ciiva.com/26841/ft232rl-reel-26841080.pdf?src-supplier=IIIC, ComponentLink3URL=https://datasheet.ciiva.com/26841/ft232rl-reel-26841080.pdf?src-supplier=IIIC, ComponentLink4Description=https://datasheet.ciiva.com/1787/ds-ft232r-1787047.pdf?src-supplier=Digi-Key, ComponentLink4URL=https://datasheet.ciiva.com/1787/ds-ft232r-1787047.pdf?src-supplier=Digi-Key, ComponentLink5Description=https://datasheet.ciiva.com/1787/ds-ft232r-1787048.pdf?src-supplier=Digi-Key, ComponentLink5URL=https://datasheet.ciiva.com/1787/ds-ft232r-1787048.pdf?src-supplier=Digi-Key, ComponentLink6Description=https://datasheet.ciiva.com/1787/ds-ft232r-1787049.pdf?src-supplier=Digi-Key, ComponentLink6URL=https://datasheet.ciiva.com/1787/ds-ft232r-1787049.pdf?src-supplier=Digi-Key, ComponentLink7Description=https://datasheet.ciiva.com/15150/getdatasheetpartid-643207-15150506.pdf?src-supplier=Verical, ComponentLink7URL=https://datasheet.ciiva.com/15150/getdatasheetpartid-643207-15150506.pdf?src-supplier=Verical, ComponentLink8Description=https://datasheet.ciiva.com/16200/ds-ft232r-16200652.pdf?src-supplier=Future+Electronics, ComponentLink8URL=https://datasheet.ciiva.com/16200/ds-ft232r-16200652.pdf?src-supplier=Future+Electronics, Data Rate=12Mbps, Height=1.75mm, Interface=UART,RS-232,RS-422,RS-485, Lead Free="Lead Free", Length=10.2mm, Mount="Surface Mount", Number of Channels=1, Number of Pins=28, Number of Transceivers=1, Packaging="Tape and Reel", Pricing 1="1=4.50000, 10=4.05000, 50=3.85000, 100=3.65000, 250=3.25000, 500=2.85002, 1000=2.65000 (USD)", Radiation Hardening=No, REACH SVHC="No SVHC", RoHS=Yes, Stock 1=32837, Supplier 1=Digi-Key, Weight=0.080001oz, Width=5.3mm

## Free pads (board coordinates)
  round 2.5 hole 2.5: ""(2.5,2.5)
  round 2.5 hole 2.5 unplated: ""(2.5,43.5) ""(29.5,2.5) ""(29.5,43.5)

## Via types
v1: diameter 0.762, hole 0.381, Top Layer to Bottom Layer, tented both sides, 24 vias

## Nets (pads, with @x,y where several pads share a name; then routed paths per layer and width w, separated by ;. In a path a pad name is that pad's centre, name@x,y a point inside that pad or via, vN(x,y) a via of type N, cw(c..) or ccw(c..) an arc to the next point about the centre after c; other vN are vias at no path point)
+3V3: C4.2 C5.2 C6.2 P3.5 P3.6 R2.2 R3.2 R7.2 R8.2 R9.2 U1.4 U1.13 U2.5 U3.4 | length 20.1
  Top Layer w0.152: R8.2 v1(22.35,17.4) R9.2 ; v1(24.25,13.05) R3.2 R2.2
  Top Layer w0.203: R7.2 v1(5.5,13.4) ; v1(12.8,23.8) 12.8,24.975 C5.2 U1.13 ; U1.4 C6.2@18.877,25.5 ; C6.2 19.175,26.575 19.8,27.2 v1(21.1,27.2)
  Top Layer w0.356: v1(23.8,35.7) 23.8,37.087 23.9,37.187 U2.5 23.887,37.353 24.01,37.475 C4.2
  Mid Layer 1 w0.152: v1(22.35,17.4) v1@22.4,17.4
  Bottom Layer w0.203: v1(10,28.1) 10.625,28.725 U3.4
BOOT0: R1.2 U1.20 U3.13 | length 18.5
  Top Layer w0.152: U1.20 17.8,23.5 18.6,22.7 v1(18.6,22.6) R1.2
  Bottom Layer w0.152: U3.13 13.925,34.575 15.7,32.8 15.7,25.5 v1(18.6,22.6)
D_N: J1.2 U3.16 | length 17.5
  Top Layer w0.152: J1.2 10.526,41.251 10.526,40.71 10.503,40.687 10.503,39.594 10.782,39.315 v1(10.782,39.2)
  Bottom Layer w0.152: v1(10.782,39.2) 10.782,39.085 10.503,38.806 10.503,38.197 12.4,36.3 20.729,36.3 21.027,36.002 21.027,35.023 20.726,34.722 19.722,34.722 U3.16
D_P: J1.3 U3.15 | length 16.8
  Top Layer w0.152: v1(9.868,39.2) 9.868,39.315 10.147,39.594 10.147,40.687 10.124,40.71 10.124,41.251 J1.3
  Bottom Layer w0.152: v1(9.868,39.2) 9.868,39.085 10.147,38.806 10.147,38.05 12.253,35.944 20.537,35.944 20.626,35.855 20.626,35.167 20.537,35.078 19.722,35.078 U3.15
GND: C1.1 C2.1 C3.1 C4.1 C5.1 C6.1 C7.1 C8.1 C9.1 D1.3 D2.2 D3.2 D4.2 J1.5 J1.6 P1.2 P2.1 P3.4 R1.1 S1.2 S2.2 U1.12 U2.2 U3.7 U3.11 U3.18 U3.21 U3.25 U3.26
  other v1: 22.2,25.8 18.8,37 6.9,39.2
NetC1_2: C1.2 C2.2 D5.1 F1.2 | length 6.4
  Bottom Layer w0.356: F1.2 19.95,44.4 D5.1
NetC8_2: C8.2 D1.1 R7.1 | length 4
  Top Layer w0.203: R7.1 2.757,13.393 2.757,11.818 C8.2 2.775,9.898 3.123,9.55 D1.1
NetC9_2: C9.2 U3.17 | length 3
  Bottom Layer w0.203: U3.17 21.175,33.925 21.439,33.661 22.464,33.661 C9.2
NetD2_1: D2.1 R4.1 | length 1.4
  Top Layer w0.152: D2.1 R4.1
NetD3_1: D3.1 R5.1 | length 1.4
  Top Layer w0.152: D3.1 R5.1
NetD4_1: D4.1 R6.1 | length 1.4
  Top Layer w0.152: D4.1 R6.1
NetD6_1: D6.1 P2.4 | length 2.5
  Bottom Layer w0.356: P2.4 12.19,9.44 D6.1
PA0: P4.4 U1.5 | length 11.7
  Top Layer w0.152: U1.5 17.5,26.9 18.7,28.1 25.17,28.1 P4.4
PA1: P4.3 U1.6 | length 11.4
  Top Layer w0.152: U1.6 17,27.3 18.51,28.81 P4.3
PA4: P4.2 U1.7 | length 13.4
  Top Layer w0.152: U1.7 16.5,27.7 18.4,29.6 25.25,29.6 P4.2
PA5: P4.1 U1.8 | length 15.2
  Top Layer w0.152: U1.8 16,28.1 18.3,30.4 23.51,30.4 P4.1
PA6: P3.1 U1.9 | length 14.5
  Top Layer w0.152: P3.1 5.89,33 10.2,33 15.5,27.7 U1.9
PA7: P3.2 U1.10 | length 13.2
  Top Layer w0.152: P3.2 5.95,32.3 9.9,32.3 15,27.2 U1.10
PA9: P3.7 R5.2 U1.14 U3.5 | length 51.1
  Top Layer w0.152: P3.7 5.85,17.8 8.1,17.8 13.8,23.5 13.8,24.1 14.2,24.5 U1.14 ; v1(15.9,18.6) 16,18.5 R5.2
  Bottom Layer w0.152: U3.5 9.575,29.375 7.4,27.2 7.4,19.4 6.65,18.65 P3.7 4.05,18.65 3,17.6 3,14.9 3.8,14.1 7.4,14.1 11.9,18.6 v1(15.9,18.6)
PA10: P3.8 R6.2 U1.15 U3.1 | length 34.4
  Top Layer w0.152: P3.8 5.89,17 8.1,17 13.4,22.3 ; R6.2 13.4,22.3 ; U1.15 14.5,23.4 13.4,22.3
  Bottom Layer w0.152: P3.8 6.91,16.11 9.1,18.3 9.1,26 9.875,26.775 U3.1
PB1: D1.4 P3.3 U1.11 | length 36.9
  Top Layer w0.152: D1.4 8.05,12.55 6,14.6 2.9,14.6 1.9,15.6 1.9,27.5 3.21,28.81 P3.3 4.91,28.9 11.3,28.9 14.2,26 U1.11
PB6: P4.8 R8.1 U1.18 | length 17.2
  Top Layer w0.152: U1.18 16,21.9 16.7,21.2 v1(16.7,21.1) ; v1(24.1,14.8) 24.1,16.05 R8.1 26.99,16.1 P4.8
  Bottom Layer w0.152: v1(16.7,21.1) 23,14.8 v1(24.1,14.8)
PB7: P4.7 R9.1 U1.19 | length 15.1
  Top Layer w0.152: U1.19 16.5,22.7 v1(16.9,22.3) ; v1(24.1,17.4) 24.1,18.65 R9.1 26.95,18.7 P4.7
  Bottom Layer w0.152: v1(16.9,22.3) 17.8,21.4 20.1,21.4 v1(24.1,17.4)
PC14: P4.6 R4.2 U1.1 | length 16
  Top Layer w0.152: U1.1 18.3,24 18.9,23.4 20.2,22.1 ; R4.2 18.6,18.1 20.2,19.7 20.2,22.1 ; P4.6 26.09,22.1 20.2,22.1
PC15: P4.5 R3.1 S2.1 U1.2 | length 33.6
  Top Layer w0.152: U1.2 18.6,24.5 20.3,22.8 22.95,22.8 26.07,22.8 P4.5 28.67,23.73 29.7,22.7 29.7,15 28.7,14 23.2,14 22.55,13.35 R3.1 22.689,11.861 22.689,11.411 23.561,10.539 23.561,10.324 23.884,10 S2.1
RESET: C7.2 R2.1 S1.1 U1.3 U3.14 | length 39.4
  Top Layer w0.152: U1.3 18.9,25 20.2,23.7 v1(20.9,23.7) ; v1@27.3,13.1 v1(27.3,13.05) R2.1 C7.2 28.675,10.125 S1.1
  Bottom Layer w0.152: U3.14 14.175,35.225 16.4,33 16.4,25.9 18.6,23.7 v1(20.9,23.7) 25.3,19.3 25.3,15.05 v1(27.3,13.05)
SWCLK: P2.2 U1.17 | length 17.5
  Top Layer w0.152: U1.17 15.5,21 17.3,19.2 17.3,7.03 P2.2
SWDIO: P2.3 U1.16 | length 16.6
  Top Layer w0.152: P2.3 14.74,7.01 14.74,20.74 15,21 U1.16
VBUS: F1.1 J1.1 | length 6
  Top Layer w0.356: J1.1@11.3,41.725 11.3,40.4 12.1,39.6 v1(12.1,38.7)
  Bottom Layer w0.356: v1(12.1,38.7) 12.1,39.4 12.178,39.478 12.178,39.628 12.75,40.2 F1.1
VCC: C3.2 D5.2 D6.2 D7.2 U2.1 U2.3 U3.20 | length 14.4
  Top Layer w0.356: D7.2 v1(20,40.6) 20.037,40.563 C3.2 21.025,39.225 21.6,39.8 U2.3 21.987,38.813 22.3,38.5 23.6,38.5 23.887,38.787 U2.1
  Bottom Layer w0.203: U3.20 19.6,32 v1(21,32)
  Bottom Layer w0.356: v1(20,40.6) D5.2
  Bottom Layer w0.381: v1(10.65,11.35) D6.2
VIN: D7.1 P1.1 | length 2.8
  Top Layer w0.356: D7.1 21.949,44.35 22.199,44.1 P1.1
pads on no net: D1.2 J1.4 U2.4 U3.2 U3.3 U3.6 U3.8 U3.9 U3.10 U3.12 U3.19 U3.22 U3.23 U3.24 U3.27 U3.28

## Polygon pours and split planes (outlines as drawn)
GND on Bottom Layer "GND_L04_P004" (solid, pour order 4): 0,0 0,46 32,46 32,0
GND on Top Layer "GND_L01_P002" (solid, pour order 2): 0,0 0,46 32,46 32,0
+3V3 on Mid Layer 1 "+3V3_L02_P005" (solid, pour order 5): 0,0 32,0 32,46 0,46
VCC on Mid Layer 2 "VCC_L03_P006" (solid, pour order 6): 0,0 32,0 32,46 0,46

## Silkscreen, mask and mechanical layers (free items; w line width, h text height)
Top Overlay:
  text "+" at 22.33,41.3 h1.27
  text "-" at 24.87,41.3 h1.27
  text "MISO" at 0.6,33.49 h0.76
  text "SCK" at 28.8,33.49 h0.76
  text "MOSI" at 0.6,30.95 h0.76
  text "NSS" at 28.8,30.95 h0.76
  text "STM32L021F4 / Development Board / Jeff Longo / v2" at 9.652,30 h0.76
  text "RGB" at 0.6,28.41 h0.76
  text "PA1" at 28.8,28.41 h0.76
  text "GND" at 0.6,25.87 h0.76
  text "PA0" at 28.8,25.87 h0.76
  text "3V3" at 0.6,23.33 h0.76
  text "BTN" at 28.8,23.33 h0.76
  text "3V3" at 0.6,20.79 h0.76
  text "LED" at 28.8,20.79 h0.76
  text "TX" at 0.6,18.25 h0.76
  text "SDA" at 28.8,18.25 h0.76
  text "RX" at 0.6,15.71 h0.76
  text "SCL" at 28.8,15.71 h0.76
  text "+" at 11.79,8.7 h1.27
  text "D" at 14.33,8.7 h1.27
  text "C" at 16.87,8.7 h1.27
  text "-" at 19.41,8.7 h1.27
  text "BTN" at 26.6,7.3 h0.76 r90
  text "RST" at 31.3,7.3 h0.76 r90
Bottom Overlay:
  text "PA6" at 3,33.49 h0.76
  text "PA5" at 31.2,33.49 h0.76
  text "PA7" at 3,30.95 h0.76
  text "PA4" at 31.2,30.95 h0.76
  text "PB1" at 3,28.41 h0.76
  text "PA1" at 31.2,28.41 h0.76
  text "GND" at 3,25.87 h0.76
  text "PA0" at 31.2,25.87 h0.76
  text "3V3" at 3,23.33 h0.76
  text "PC15" at 31.2,23.33 h0.76
  text "3V3" at 3,20.79 h0.76
  text "PC14" at 31.2,20.79 h0.76
  text "PA9" at 3,18.25 h0.76
  text "PB7" at 31.2,18.25 h0.76
  text "PB6" at 31.2,15.71 h0.76
  text "PA10" at 3.2,15.7 h0.76
Mechanical 1:
  lines w0.1: 1,0 cw(c1,1) 0,1 0,45 cw(c1,45) 1,46 31,46 cw(c31,45) 32,45 32,1 cw(c31,1) 31,0 1,0 ; 1,0 1,0